# EAGLE board untitled (EAGLE 5.06)
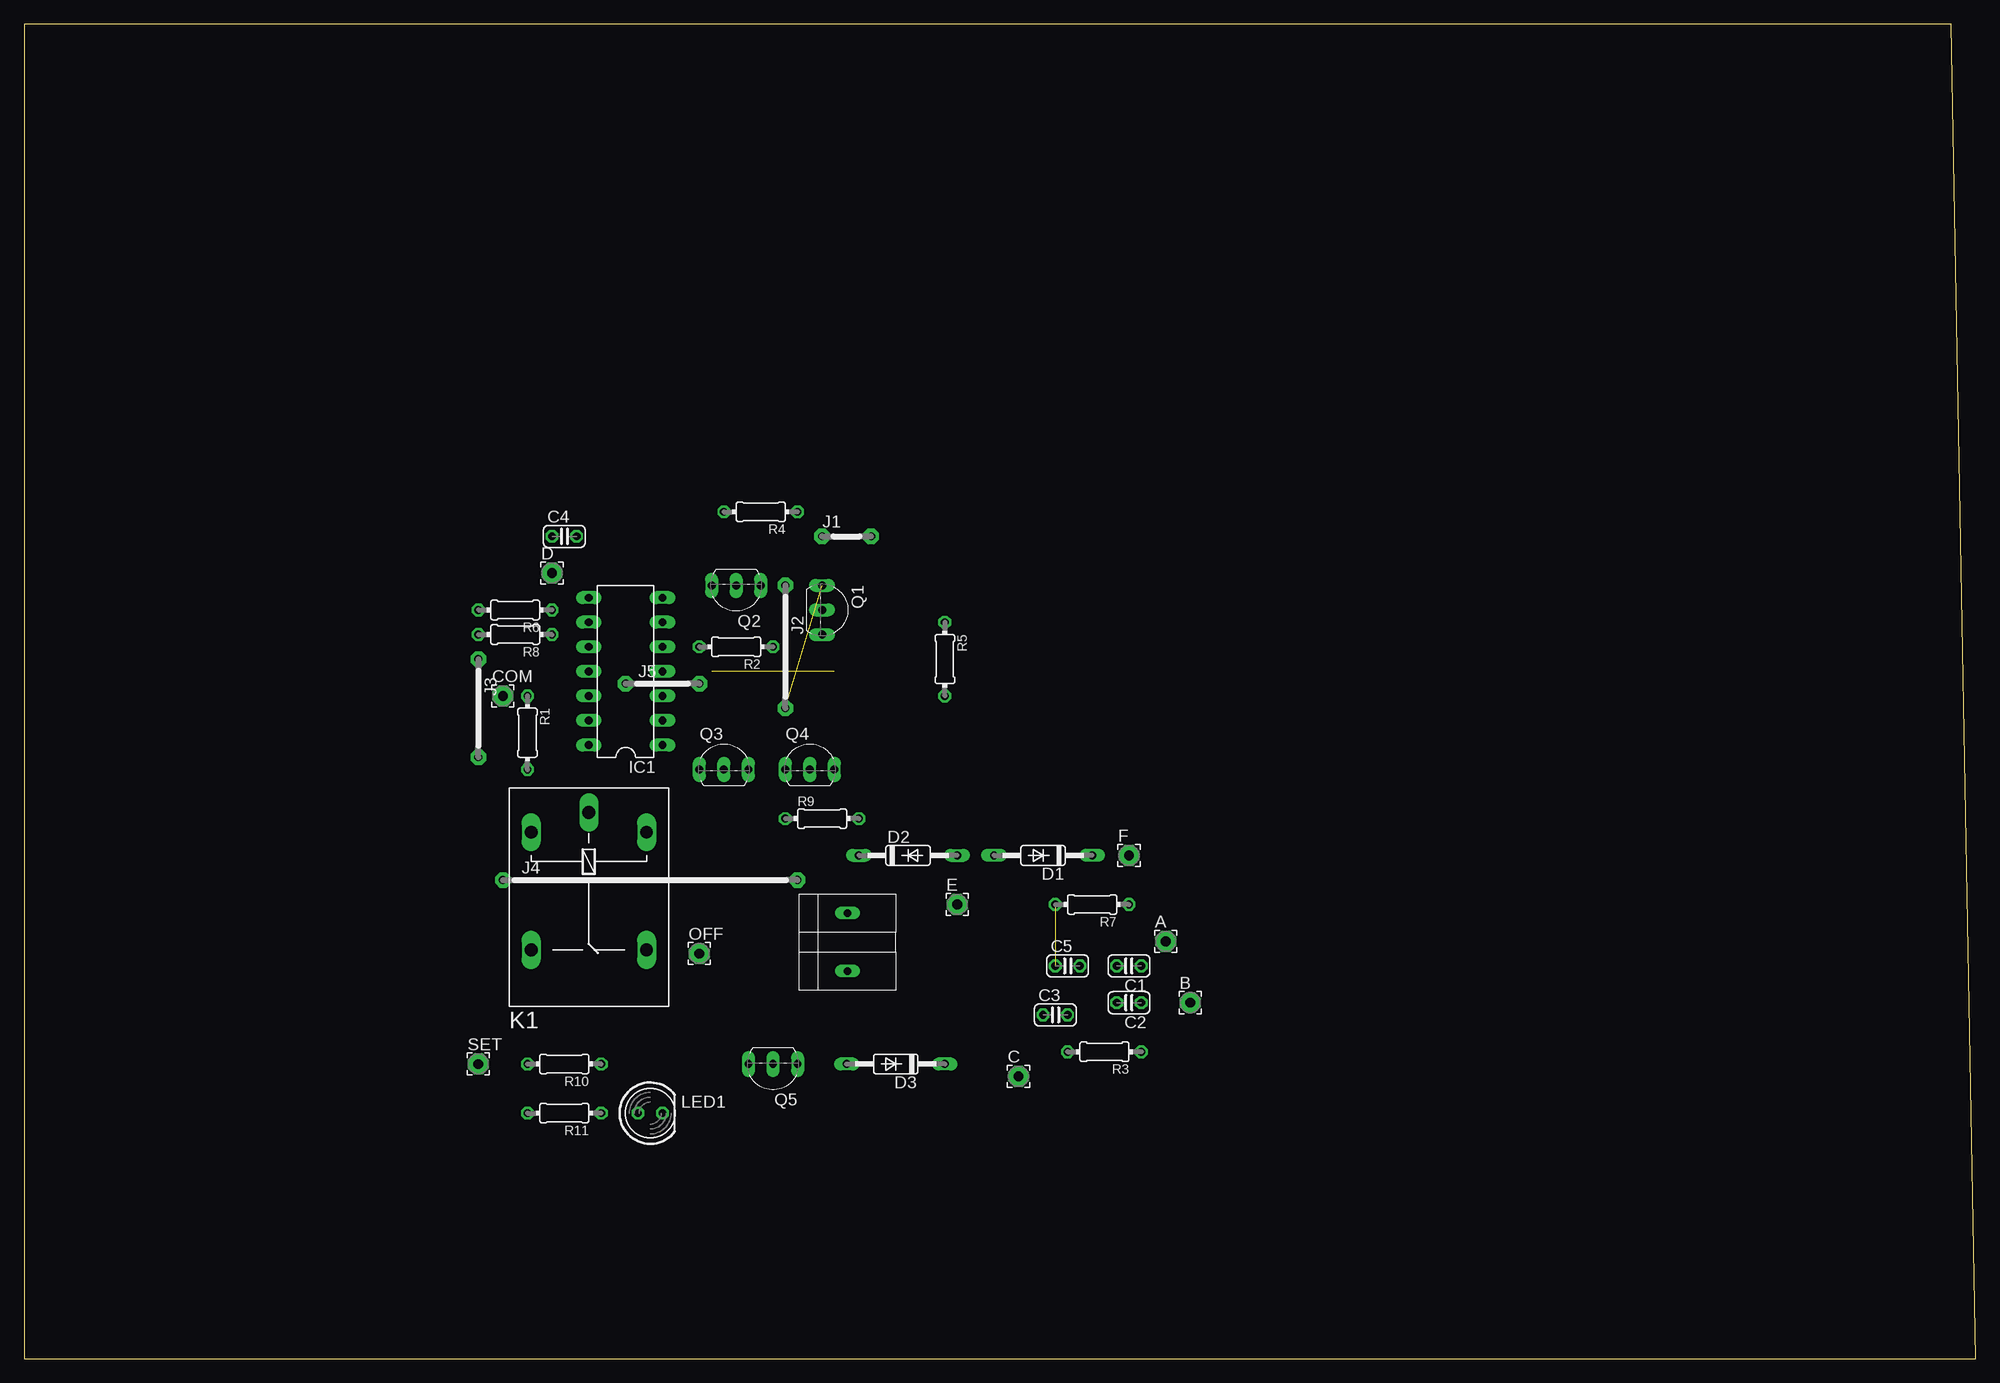
[diagram p0: board, top side]
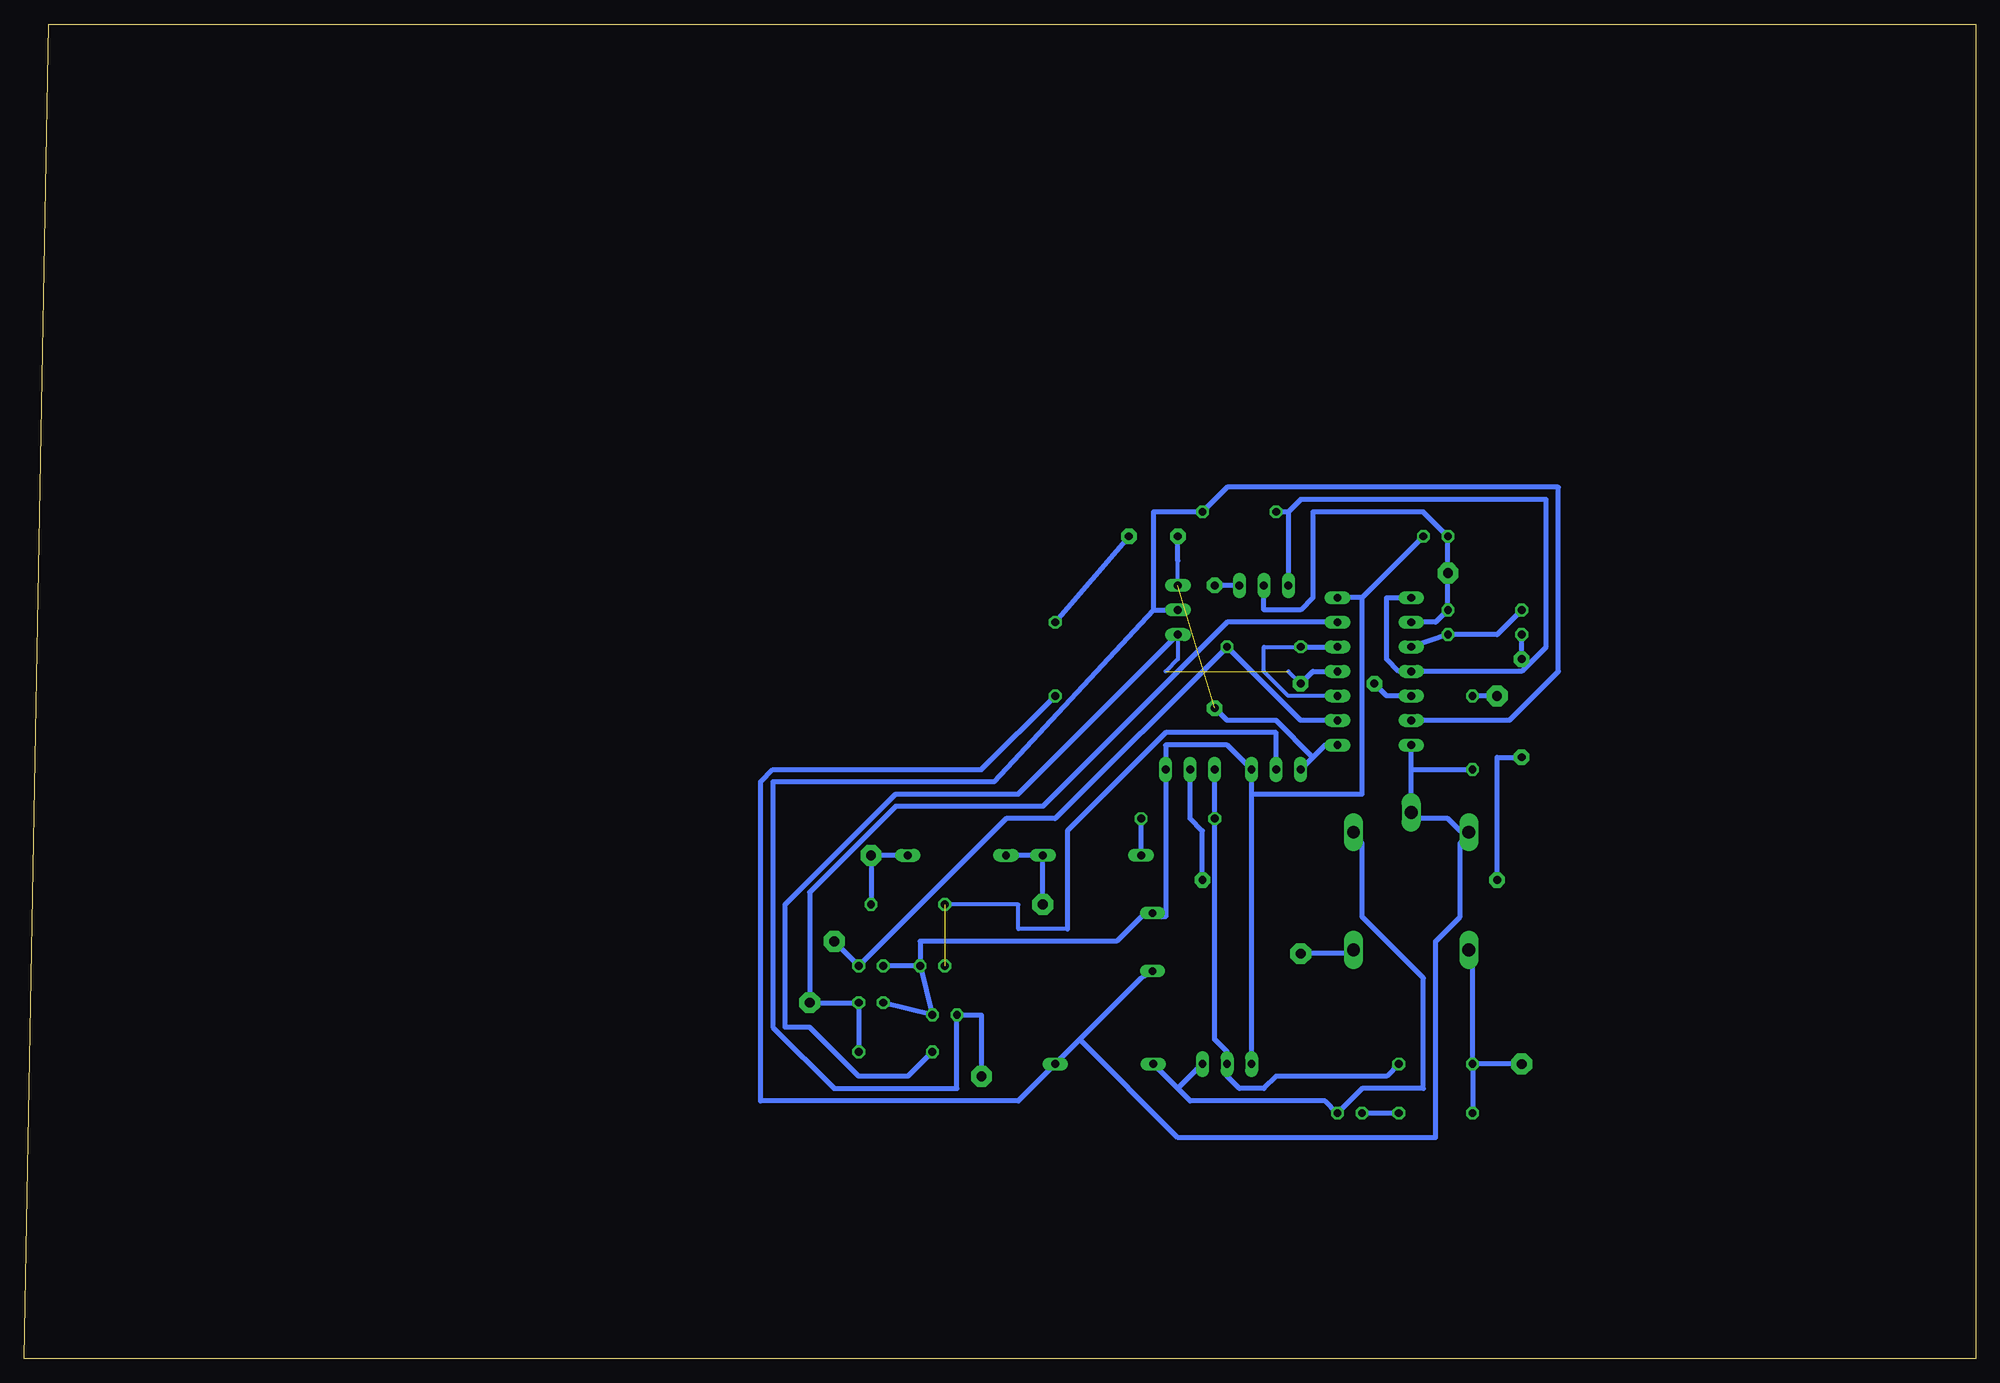
[diagram p1: board, bottom side, seen from below]

Size 201.91 x 138.1 mm. Coordinates in mm from the lower left corner, seen from the top.
Outline: 0,0 201.91,0 199.37,138.1 0,138.1 0,0
Copper layers (1*16): Top 0.035mm / dielectric 1.5mm / Bottom 0.035mm
Design rules "default *": minimum track width 20mil, minimum drill 24mil, track to track 8mil, track to pad 8mil, pad to pad 8mil, via to via 10mil, smd to smd 8mil, copper to edge 40mil, drill to drill 8mil, minimum pad ring 10mil, minimum via ring 8mil, stop-mask expansion 4mil, vias tented up to drill 0mil, thermal gap 10mil

## Footprints (pad centres in the part's own frame; a part is rotated, then mirrored left to right if it is on the bottom)
2,15/1,0 = drill 1.016 pad 2.159 octagon: 1 0,0
BORNE_2_PCI = drill 0.8 long: P$1 -3.08,-0.08; P$2 2.92,-0.08
C025-024X044 = drill 0.813 octagon: 1 -1.27,0; 2 1.27,0
DO35-10 = drill 0.813 long: A 5.08,0; C -5.08,0
DIL14 = drill 0.813 long: 1 -7.62,-3.81; 2 -5.08,-3.81; 3 -2.54,-3.81; 4 0,-3.81; 5 2.54,-3.81; 6 5.08,-3.81; 7 7.62,-3.81; 8 7.62,3.81; 9 5.08,3.81; 10 2.54,3.81; 11 0,3.81; 12 -2.54,3.81; 13 -5.08,3.81; 14 -7.62,3.81
05 = drill 0.813 pad 1.6 octagon: 1 -2.54,0; 2 2.54,0
12 = drill 0.813 pad 1.6 octagon: 1 -6.35,0; 2 6.35,0
10 = drill 0.813 pad 1.6 octagon: 1 -5.08,0; 2 5.08,0
30 = drill 0.813 pad 1.6 octagon: 1 -15.24,0; 2 15.24,0
07 = drill 0.813 pad 1.6 octagon: 1 -3.81,0; 2 3.81,0
G5LE = drill 1.321 long: 1 -7.493,-5.969; 2 -7.493,5.969; O 4.699,5.969; P -9.525,0; S 4.699,-5.969
LED5MM = drill 0.813 octagon: A -1.27,0; K 1.27,0
TO92-EBC = drill 0.813 long: B 0,-1.27; C -2.54,-1.27; E 2.54,-1.27
0204/7 = drill 0.813 octagon: 1 -3.81,0; 2 3.81,0

## Placement (x,y rotation side)
A  [2,15/1,0]  118.11,43.18 0 top
B  [2,15/1,0]  120.65,36.83 0 top
BORNE_2_PCI2  BORNE_2_PCI  [BORNE_2_PCI]  85.09,43.18 90 top
C  [2,15/1,0]  102.87,29.21 0 top
C1  [C025-024X044]  114.3,40.64 180 top
C2  [C025-024X044]  114.3,36.83 180 top
C3  [C025-024X044]  106.68,35.56 0 top
C4  [C025-024X044]  55.88,85.09 0 top
C5  [C025-024X044]  107.95,40.64 0 top
COM  [2,15/1,0]  49.53,68.58 0 top
D  [2,15/1,0]  54.61,81.28 0 top
D1  1N4148DO35-10  [DO35-10]  105.41,52.07 180 top
D2  1N4148DO35-10  [DO35-10]  91.44,52.07 0 top
D3  1N4148DO35-10  [DO35-10]  90.17,30.48 180 top
E  [2,15/1,0]  96.52,46.99 0 top
F  [2,15/1,0]  114.3,52.07 0 top
IC1  4081N  [DIL14]  62.23,71.12 90 top
J1  J5MM  [05]  85.09,85.09 0 top
J2  J12MM  [12]  78.74,73.66 270 top
J3  J10MM  [10]  46.99,67.31 270 top
J4  J30MM  [30]  64.77,49.53 0 top
J5  J7MM  [07]  66.04,69.85 0 top
K1  G5LE  [G5LE]  58.42,46.99 270 top
LED1  [LED5MM]  64.77,25.4 0 top
OFF  [2,15/1,0]  69.85,41.91 0 top
Q1  BC447  [TO92-EBC]  83.82,77.47 270 top
Q2  BC447  [TO92-EBC]  73.66,78.74 180 top
Q3  BC447  [TO92-EBC]  72.39,62.23 0 top
Q4  BC447  [TO92-EBC]  81.28,62.23 0 top
Q5  BC447  [TO92-EBC]  77.47,29.21 180 top
R1  4k7  [0204/7]  52.07,64.77 270 top
R2  27k  [0204/7]  73.66,73.66 180 top
R3  27k  [0204/7]  111.76,31.75 180 top
R4  27k  [0204/7]  76.2,87.63 180 top
R5  27k  [0204/7]  95.25,72.39 270 top
R6  27k  [0204/7]  50.8,77.47 180 top
R7  4k7  [0204/7]  110.49,46.99 180 top
R8  4k7  [0204/7]  50.8,74.93 180 top
R9  4k7  [0204/7]  82.55,55.88 0 top
R10  4k7  [0204/7]  55.88,30.48 180 top
R11  2k2  [0204/7]  55.88,25.4 180 top
SET  [2,15/1,0]  46.99,30.48 0 top

## Library data of the parts
A B C COM D E F OFF SET = wirepad
BORNE_2_PCI2 = BORNE_2_PCI
C1-C5 R1-R11 = rcl
D1-D3 = diode
IC1 = 40xx
J1-J5 = jumper
K1 = relay
LED1 = led
Q1-Q5 = transistor-npn

## Nets
GND: BORNE_2_PCI2.P$2 C1.2 C2.2 C3.2 C4.2 C5.2 IC1.7 Q3.E Q4.E Q5.E
N$1: A.1 C1.1 IC1.2 R2.1
N$2: B.1 C2.1 IC1.6 R3.1
N$3: C4.1 D.1 IC1.9 Q2.B R6.1
N$4: J2.1 Q2.C
N$5: IC1.3 IC1.5 R2.2
N$6: IC1.4 J5.2 Q1.E R3.2
N$7: IC1.8 IC1.11 Q2.E R4.2
N$8: IC1.10 R6.2 R8.1
N$9: IC1.1 J1.1 J2.2 Q1.C Q3.C
N$10: D1.C F.1 R7.1
N$11: J1.2 R5.1
N$12: D1.A D2.A E.1
N$13: D2.C R9.2
N$14: Q4.C Q5.B R9.1 R10.1
N$15: J3.1 R8.2
N$16: LED1.A R11.1
N$17: COM.1 R1.1
N$18: K1.S R10.2 R11.2 SET.1
N$19: D3.A K1.2 LED1.K Q5.C
N$20: K1.O OFF.1
N$21: C5.1 Q3.B R7.2
N$22: C3.1 C.1 IC1.13 Q1.B R4.1
N$23: J3.2 J4.1
N$24: J4.2 Q4.B
N$25: IC1.12 J5.1
VCC: BORNE_2_PCI2.P$1 D3.C IC1.14 K1.1 K1.P R1.2 R5.2

## Tracks (layer width: path | path; a pad name or v marks a point on that pad's centre or on a via)
GND
  Bottom 0.508: C5.2 109.22,43.18 88.9,43.18 86.36,45.72 BORNE_2_PCI2.P$2 85.09,45.72 83.82,45.72 Q4.E 83.82,63.5 77.47,63.5 Q3.E 74.93,58.42 | C5.2 C3.2 C2.2 | C5.2 C1.2 | 63.5,78.74 C4.2 | 63.5,78.74 IC1.7 | Q5.E 74.93,58.42 | 63.5,78.74 63.5,58.42 74.93,58.42
N$1
  Bottom 0.508: A.1 C1.1 100.33,55.88 95.25,55.88 R2.1 69.85,66.04 IC1.2
N$2
  Bottom 0.508: R3.1 C2.1 B.1 120.65,48.26 111.76,57.15 96.52,57.15 77.47,76.2 IC1.6
N$3
  Bottom 0.508: IC1.9 55.88,76.2 R6.1 D.1 C4.1 57.15,87.63 68.58,87.63 68.58,78.74 69.85,77.47 73.66,77.47 Q2.B
N$4
  Bottom 0.508: Q2.C J2.1
N$5
  Bottom 0.406: R2.2 73.66,73.66 73.66,71.12 71.12,68.58 IC1.3
  Bottom 0.508: R2.2 IC1.5
N$6  (1 unrouted)
  Bottom 0.406: J5.2 71.12,71.12 | Q1.E 82.55,72.39 83.82,71.12
  Bottom 0.508: Q1.E 99.06,58.42 111.76,58.42 123.19,46.99 123.19,34.29 120.65,34.29 115.57,29.21 110.49,29.21 R3.2 | J5.2 68.58,71.12 IC1.4
N$7
  Bottom 0.508: IC1.8 60.96,78.74 60.96,72.39 59.69,71.12 IC1.11 46.99,71.12 44.45,73.66 44.45,88.9 69.85,88.9 71.12,87.63 | 71.12,87.63 Q2.E | 71.12,87.63 R4.2
N$8
  Bottom 0.508: R6.2 49.53,74.93 R8.1 IC1.10
N$9  (1 unrouted)
  Bottom 0.406: Q1.C 82.55,82.55
  Bottom 0.508: 68.58,62.23 67.31,63.5 IC1.1 | 68.58,62.23 Q3.C | 82.55,82.55 J1.1 | J2.2 77.47,66.04 72.39,66.04 68.58,62.23
N$10
  Bottom 0.508: D1.C F.1 R7.1
N$11
  Bottom 0.508: J1.2 R5.1
N$12
  Bottom 0.508: D1.A D2.A E.1
N$13
  Bottom 0.508: D2.C R9.2
N$14
  Bottom 0.508: R10.1 60.96,29.21 72.39,29.21 73.66,27.94 76.2,27.94 77.47,29.21 Q5.B 77.47,31.75 78.74,33.02 R9.1 Q4.C
N$15
  Bottom 0.508: J3.1 R8.2
N$16
  Bottom 0.508: R11.1 LED1.A
N$17
  Bottom 0.508: COM.1 R1.1
N$18
  Bottom 0.508: R10.2 R11.2 | SET.1 R10.2 | R10.2 52.07,41.91 K1.S
N$19
  Bottom 0.508: 82.55,27.94 D3.A | 82.55,27.94 81.28,26.67 67.31,26.67 LED1.K 63.5,27.94 57.15,27.94 57.15,39.37 63.5,45.72 63.5,53.34 K1.2 | 82.55,27.94 Q5.C
N$20
  Bottom 0.508: OFF.1 64.77,41.91 K1.O
N$21  (1 unrouted)
  Bottom 0.406: 93.98,44.45 99.06,44.45 99.06,46.99 R7.2
  Bottom 0.508: Q3.B 72.39,64.77 83.82,64.77 93.98,54.61 93.98,44.45
N$22
  Bottom 0.508: C.1 102.87,35.56 C3.1 105.41,27.94 118.11,27.94 124.46,34.29 124.46,59.69 101.6,59.69 85.09,77.47 | IC1.13 48.26,66.04 43.18,71.12 43.18,90.17 77.47,90.17 R4.1 85.09,87.63 85.09,77.47 | 85.09,77.47 Q1.B
N$23
  Bottom 0.508: J4.1 49.53,62.23 J3.2
N$24
  Bottom 0.508: J4.2 80.01,54.61 81.28,55.88 Q4.B
N$25
  Bottom 0.508: IC1.12 60.96,68.58 J5.1
VCC
  Bottom 0.508: K1.1 52.07,54.61 | 58.42,60.96 K1.P 58.42,55.88 54.61,55.88 53.34,54.61 K1.1 | 58.42,60.96 IC1.14 | 92.71,33.02 D3.C 99.06,26.67 125.73,26.67 125.73,59.69 124.46,60.96 102.87,60.96 R5.2 | 92.71,33.02 86.36,39.37 BORNE_2_PCI2.P$1 | 92.71,33.02 82.55,22.86 55.88,22.86 55.88,43.18 53.34,45.72 53.34,53.34 K1.1 | 58.42,60.96 R1.2